# EAGLE board homeboard9 (EAGLE 6.0)
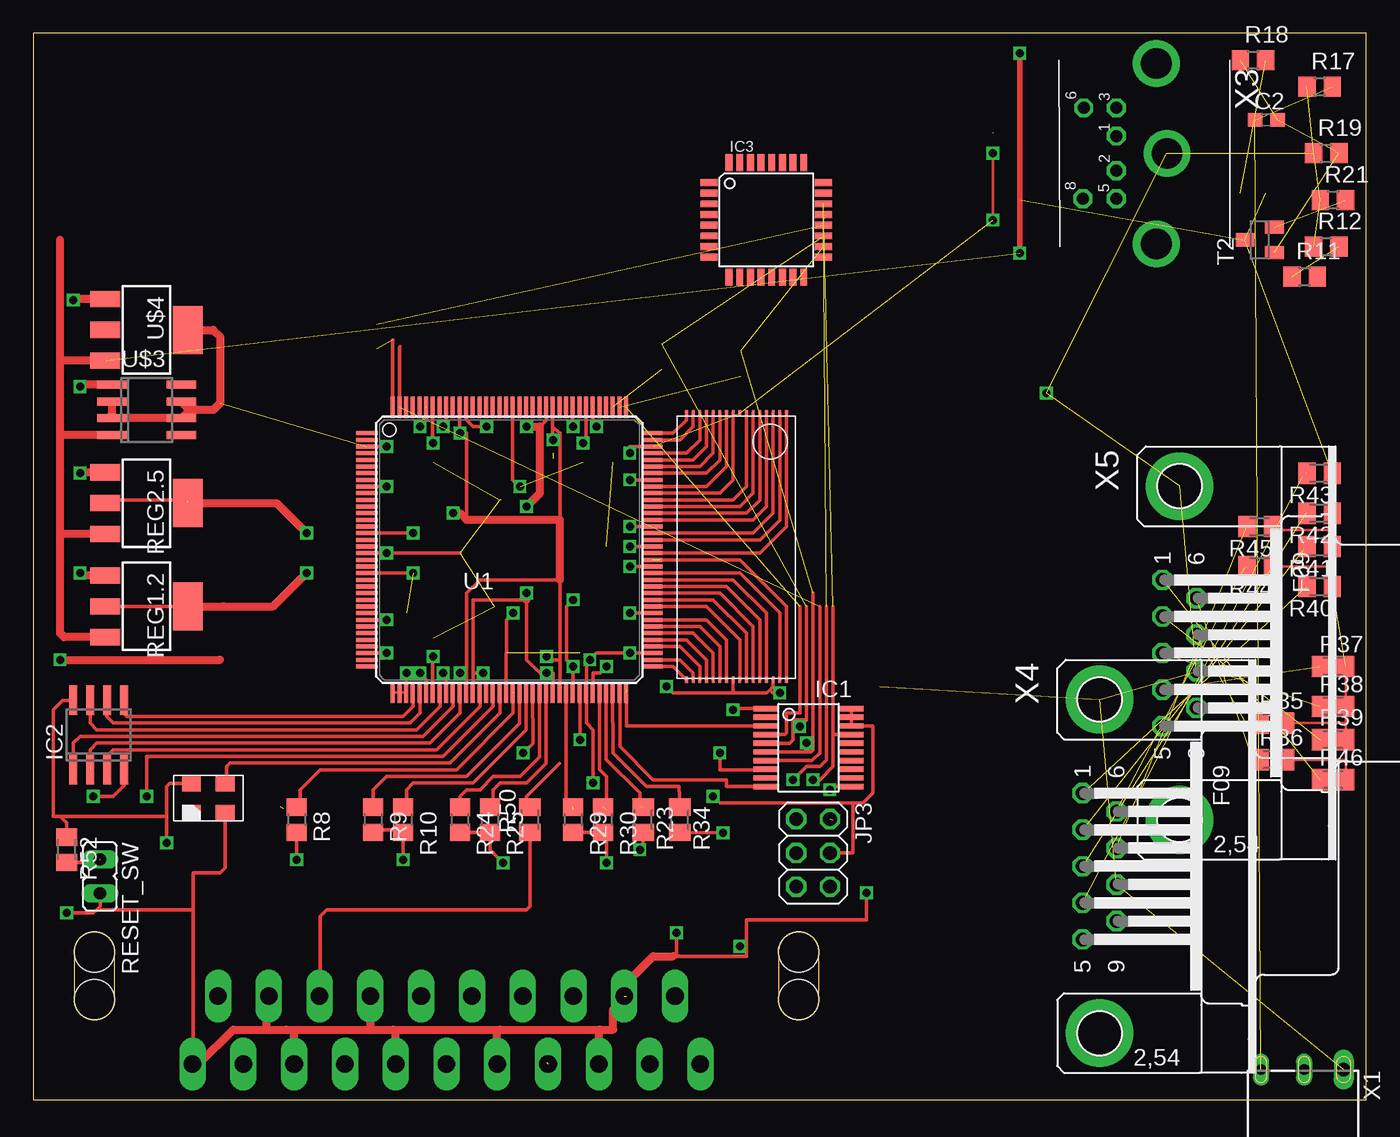
[diagram p0: board, top side]
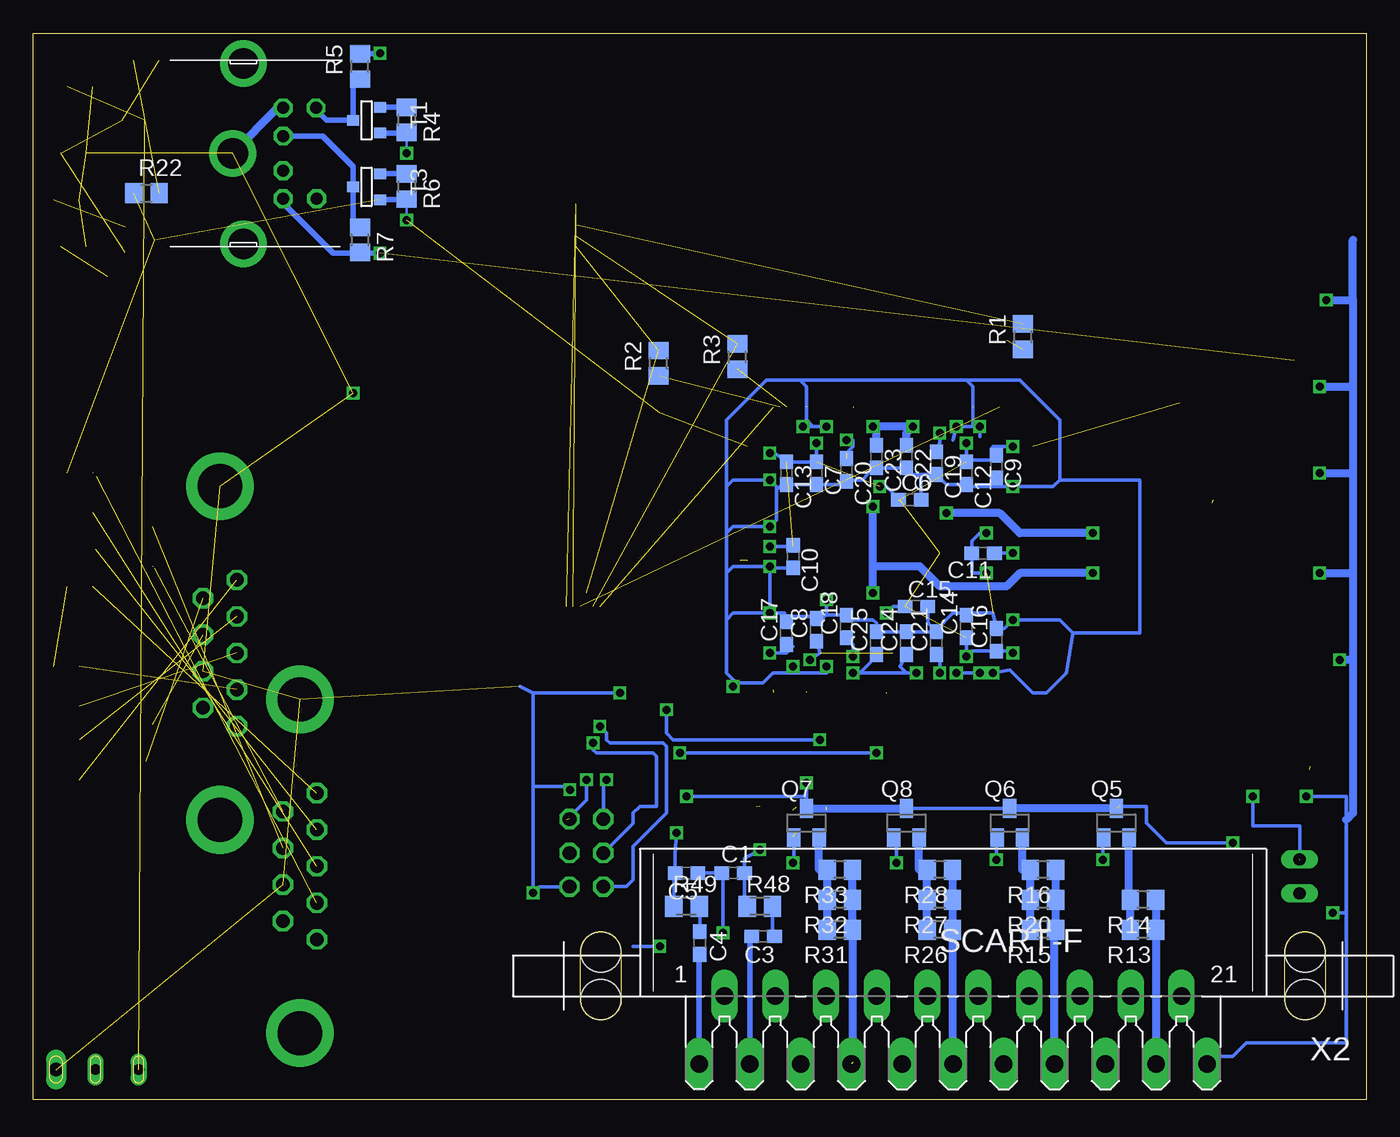
[diagram p1: board, bottom side, seen from below]

Size 100 x 80 mm. Coordinates in mm from the lower left corner, seen from the top.
Outline: 0,0 100,0 100,80 0,80 0,0
Copper layers (1*16): Top 0.0356mm / dielectric 1.5011mm / Bottom 0.0356mm
Design rules: minimum track width 6mil, minimum drill 13mil, track to track 6mil, track to pad 6mil, pad to pad 6mil, via to via 6mil, smd to smd 6mil, copper to edge 15mil, drill to drill 6mil, minimum pad ring 7mil, minimum via ring 7mil, stop-mask expansion 4mil, vias tented up to drill 0mil, thermal gap 10mil
Net classes: 1 power: width 0.6 mm, drill 1.1 mm, clearance 0.4 mm

## Footprints (pad centres in the part's own frame; a part is rotated, then mirrored left to right if it is on the bottom)
C0603 = smd 1.1 x 1: 1 -0.85,0; 2 0.85,0
VO20 = smd 0.4 x 1.8: 1 5.85,6.15; 2 5.2,6.15; 3 4.55,6.15; 4 3.9,6.15; 5 3.25,6.15; 6 2.6,6.15; 7 1.95,6.15; 8 1.3,6.15; 9 0.65,6.15; 10 0,6.15; 11 0,-0.3; 12 0.65,-0.3; 13 1.3,-0.3; 14 1.95,-0.3; 15 2.6,-0.3; 16 3.25,-0.3; 17 3.9,-0.3; 18 4.55,-0.3; 19 5.2,-0.3; 20 5.85,-0.3
SO-08 = smd 0.6 x 2.2: 1 -1.905,-2.6; 2 -0.635,-2.6; 3 0.635,-2.6; 4 1.905,-2.6; 5 1.905,2.6; 6 0.635,2.6; 7 -0.635,2.6; 8 -1.905,2.6
TQFP32-08 = smd 1.27 x 0.508: 1 -4.293,2.8; 2 -4.293,2; 3 -4.293,1.2; 4 -4.293,0.4; 5 -4.293,-0.4; 6 -4.293,-1.2; 7 -4.293,-2; 8 -4.293,-2.8; 17 4.293,-2.8; 18 4.293,-2; 19 4.293,-1.2; 20 4.293,-0.4; 21 4.293,0.4; 22 4.293,1.2; 23 4.293,2; 24 4.293,2.8 | smd 0.508 x 1.27: 9 -2.8,-4.293; 10 -2,-4.293; 11 -1.2,-4.293; 12 -0.4,-4.293; 13 0.4,-4.293; 14 1.2,-4.293; 15 2,-4.293; 16 2.8,-4.293; 25 2.8,4.293; 26 2,4.293; 27 1.2,4.293; 28 0.4,4.293; 29 -0.4,4.293; 30 -1.2,4.293; 31 -2,4.293; 32 -2.8,4.293
2X03 = drill 1.016 octagon: 1 -2.54,-1.27; 2 -2.54,1.27; 3 0,-1.27; 4 0,1.27; 5 2.54,-1.27; 6 2.54,1.27
SOT23 = smd 1 x 1.4: 1 -0.95,-1.1; 2 0.95,-1.1; 3 0,1.1
R0805 = smd 1.3 x 1.5: 1 -0.95,0; 2 0.95,0
M0805 = smd 1.3 x 1.6: 1 -0.95,0; 2 0.95,0
SOT223 = smd 1.219 x 2.235: 1 -2.311,-3.099; 2 0,-3.099; 3 2.311,-3.099 | smd 3.6 x 2.2: 4 0,3.099
JP1 = drill 0.914 long: 1 0,-1.27; 2 0,1.27
SOT-23 = smd 0.787 x 0.889: 1 0.025,-1.016; 2 -0.94,1.016; 3 0.991,1.016
TQ144 = smd 1.6 x 0.3: P1 -10.7,8.75; P2 -10.7,8.25; P3 -10.7,7.75; P4 -10.7,7.25; P5 -10.7,6.75; P6 -10.7,6.25; P7 -10.7,5.75; P8 -10.7,5.25; P9 -10.7,4.75; P10 -10.7,4.25; P11 -10.7,3.75; P12 -10.7,3.25; P13 -10.7,2.75; P14 -10.7,2.25; P15 -10.7,1.75; P16 -10.7,1.25; P17 -10.7,0.75; P18 -10.7,0.25; P19 -10.7,-0.25; P20 -10.7,-0.75; P21 -10.7,-1.25; P22 -10.7,-1.75; P23 -10.7,-2.25; P24 -10.7,-2.75; P25 -10.7,-3.25; P26 -10.7,-3.75; P27 -10.7,-4.25; P28 -10.7,-4.75; P29 -10.7,-5.25; P30 -10.7,-5.75; P31 -10.7,-6.25; P32 -10.7,-6.75; P33 -10.7,-7.25; P34 -10.7,-7.75; P35 -10.7,-8.25; P36 -10.7,-8.75; P73 10.7,-8.75; P74 10.7,-8.25; P75 10.7,-7.75; P76 10.7,-7.25; P77 10.7,-6.75; P78 10.7,-6.25; P79 10.7,-5.75; P80 10.7,-5.25; P81 10.7,-4.75; P82 10.7,-4.25; P83 10.7,-3.75; P84 10.7,-3.25; P85 10.7,-2.75; P86 10.7,-2.25; P87 10.7,-1.75; P88 10.7,-1.25; P89 10.7,-0.75; P90 10.7,-0.25; P91 10.7,0.25; P92 10.7,0.75; P93 10.7,1.25; P94 10.7,1.75; P95 10.7,2.25; P96 10.7,2.75; P97 10.7,3.25; P98 10.7,3.75; P99 10.7,4.25; P100 10.7,4.75; P101 10.7,5.25; P102 10.7,5.75; P103 10.7,6.25; P104 10.7,6.75; P105 10.7,7.25; P106 10.7,7.75; P107 10.7,8.25; P108 10.7,8.75 | smd 0.3 x 1.6: P37 -8.75,-10.7; P38 -8.25,-10.7; P39 -7.75,-10.7; P40 -7.25,-10.7; P41 -6.75,-10.7; P42 -6.25,-10.7; P43 -5.75,-10.7; P44 -5.25,-10.7; P45 -4.75,-10.7; P46 -4.25,-10.7; P47 -3.75,-10.7; P48 -3.25,-10.7; P49 -2.75,-10.7; P50 -2.25,-10.7; P51 -1.75,-10.7; P52 -1.25,-10.7; P53 -0.75,-10.7; P54 -0.25,-10.7; P55 0.25,-10.7; P56 0.75,-10.7; P57 1.25,-10.7; P58 1.75,-10.7; P59 2.25,-10.7; P60 2.75,-10.7; P61 3.25,-10.7; P62 3.75,-10.7; P63 4.25,-10.7; P64 4.75,-10.7; P65 5.25,-10.7; P66 5.75,-10.7; P67 6.25,-10.7; P68 6.75,-10.7; P69 7.25,-10.7; P70 7.75,-10.7; P71 8.25,-10.7; P72 8.75,-10.7; P109 8.75,10.7; P110 8.25,10.7; P111 7.75,10.7; P112 7.25,10.7; P113 6.75,10.7; P114 6.25,10.7; P115 5.75,10.7; P116 5.25,10.7; P117 4.75,10.7; P118 4.25,10.7; P119 3.75,10.7; P120 3.25,10.7; P121 2.75,10.7; P122 2.25,10.7; P123 1.75,10.7; P124 1.25,10.7; P125 0.75,10.7; P126 0.25,10.7; P127 -0.25,10.7; P128 -0.75,10.7; P129 -1.25,10.7; P130 -1.75,10.7; P131 -2.25,10.7; P132 -2.75,10.7; P133 -3.25,10.7; P134 -3.75,10.7; P135 -4.25,10.7; P136 -4.75,10.7; P137 -5.25,10.7; P138 -5.75,10.7; P139 -6.25,10.7; P140 -6.75,10.7; P141 -7.25,10.7; P142 -7.75,10.7; P143 -8.25,10.7; P144 -8.75,10.7
TSOP32 = smd 0.5 x 0.2: P1 -9.75,3.75; P2 -9.75,3.25; P3 -9.75,2.75; P4 -9.75,2.25; P5 -9.75,1.75; P6 -9.75,1.25; P7 -9.75,0.75; P8 -9.75,0.25; P9 -9.75,-0.25; P10 -9.75,-0.75; P11 -9.75,-1.25; P12 -9.75,-1.75; P13 -9.75,-2.25; P14 -9.75,-2.75; P15 -9.75,-3.25; P16 -9.75,-3.75; P17 10.25,-3.75; P18 10.25,-3.25; P19 10.25,-2.75; P20 10.25,-2.25; P21 10.25,-1.75; P22 10.25,-1.25; P23 10.25,-0.75; P24 10.25,-0.25; P25 10.25,0.25; P26 10.25,0.75; P27 10.25,1.25; P28 10.25,1.75; P29 10.25,2.25; P30 10.25,2.75; P31 10.25,3.25; P32 10.25,3.75
OSC_7C = smd 1.4 x 1.2: ENA -1.27,-1.1; GND 1.27,-1.1; OUT 1.27,1.1; VDD -1.27,1.1
SO8 = smd 0.6 x 2.2: 1 -1.905,-2.6; 2 -0.635,-2.6; 3 0.635,-2.6; 4 1.905,-2.6; 5 1.905,2.6; 6 0.635,2.6; 7 -0.635,2.6; 8 -1.905,2.6
1503_04 = drill 0.8 pad 1.2 long: 1 3.9,-10.25; 2 0.65,-10.25 | drill 1 pad 1.2 long: 3 -2.3,-10.25 | hole 1.6: 0,0
SCART-F = drill 1.321 long: 1 19.05,5.08; 2 17.145,0; 3 15.24,5.08; 4 13.335,0; 5 11.43,5.08; 6 9.525,0; 7 7.62,5.08; 8 5.715,0; 9 3.81,5.08; 10 1.905,0; 11 0,5.08; 12 -1.905,0; 13 -3.81,5.08; 14 -5.715,0; 15 -7.62,5.08; 16 -9.525,0; 17 -11.43,5.08; 18 -13.335,0; 19 -15.24,5.08; 20 -17.145,0; 21 -19.05,5.08 | hole 3.023: 26.416,0.254; 26.416,-3.302; -26.416,0.254; -26.416,-3.302
M_DIN6 = drill 0.9 pad 1.422 octagon: 1 -1.3,-3.75; 2 1.3,-3.75; 3 -3.4,-3.75; 5 3.4,-3.75; 6 -3.4,-6.2; 8 3.4,-6.25 | drill 2.3 pad 3.5: SH1 6.8,-0.75; SH2 0,0.05; SH3 -6.75,-0.75
F09HP = drill 1.016 octagon: 1 -5.486,-1.27; 2 -2.743,-1.27; 3 0,-1.27; 4 2.743,-1.27; 5 5.486,-1.27; 6 -4.115,1.27; 7 -1.372,1.27; 8 1.372,1.27; 9 4.115,1.27 | drill 3.302 pad 5.08: G1 -12.522,0; G2 12.522,0

## Placement (x,y rotation side)
C1  [C0603]  47.5,17 0 bottom
C2  100nF  [C0603]  92.5,73.5 0 top
C3  [C0603]  45.25,12.25 180 bottom
C4  [C0603]  50,11.75 270 bottom
C5  [C0603]  51,17 180 bottom
C6  100nF  [C0603]  34.25,45 0 bottom
C7  100nF  [C0603]  41.25,47 270 bottom
C8  100nF  [C0603]  41.25,35.25 90 bottom
C9  100nF  [C0603]  27.75,47.5 270 bottom
C10  100nF  [C0603]  43,40.75 270 bottom
C11  100nF  [C0603]  28.75,41 180 bottom
C12  100nF  [C0603]  30,47 270 bottom
C13  100nF  [C0603]  43.5,47 270 bottom
C14  100nF  [C0603]  30,35.5 90 bottom
C15  100nF  [C0603]  33.75,37 0 bottom
C16  100nF  [C0603]  27.75,34.5 90 bottom
C17  100nF  [C0603]  43.5,35 90 bottom
C18  100nF  [C0603]  39,35.5 90 bottom
C19  100nF  [C0603]  32.25,47.75 270 bottom
C20  100nF  [C0603]  39,47.25 270 bottom
C21  100nF  [C0603]  32.25,34.25 90 bottom
C22  100nF  [C0603]  34.5,48.25 270 bottom
C23  100nF  [C0603]  36.75,48.25 270 bottom
C24  100nF  [C0603]  34.5,34.25 90 bottom
C25  100nF  [C0603]  36.75,34.25 90 bottom
IC1  XCF02S  [VO20]  61.09,23.49 90 top
IC2  25LC080SN  [SO-08]  4.9,27.36 0 top
IC3  ATMEGA32U2-TQFP  [TQFP32-08]  55,66 0 top
JP3  [2X03]  58.5,18.5 270 top
Q5  BC848SMD  [SOT23]  18.75,20.75 0 bottom
Q6  BC848SMD  [SOT23]  26.75,20.75 0 bottom
Q7  BC848SMD  [SOT23]  42,20.75 0 bottom
Q8  BC848SMD  [SOT23]  34.5,20.75 0 bottom
R1  100  [R0805]  25.75,57.24 90 bottom
R2  100  [R0805]  53.08,55.25 90 bottom
R3  100  [R0805]  47.18,55.74 90 bottom
R4  1000  [R0805]  72,73.5 270 bottom
R5  1000  [R0805]  75.5,77.5 90 bottom
R6  1000  [R0805]  72,68.5 270 bottom
R7  1000  [R0805]  75.5,64.5 270 bottom
R8  2200  [R0805]  19.75,21 270 top
R9  2200  [R0805]  25.5,21 270 top
R10  1000  [R0805]  27.75,21 270 top
R11  75  [R0805]  95.38,61.75 0 top
R12  750  [R0805]  97,64 0 top
R13  680  [R0805]  16.75,12.75 180 bottom
R14  2200  [R0805]  16.75,15 180 bottom
R15  270  [R0805]  24.25,12.75 180 bottom
R16  680  [R0805]  24.25,17.25 180 bottom
R17  10000  [R0805]  96.5,76 0 top
R18  4700  [R0805]  91.5,78 0 top
R19  10000  [R0805]  97,71 0 top
R20  4700  [R0805]  24.25,15 180 bottom
R21  47000  [R0805]  97.5,67.5 0 top
R22  1000  [R0805]  91.5,68 0 bottom
R23  [M0805]  45.75,21 270 top
R24  2200  [R0805]  32,21 270 top
R25  1000  [R0805]  34.25,21 270 top
R26  270  [R0805]  32,12.75 180 bottom
R27  680  [R0805]  32,15 180 bottom
R28  4700  [R0805]  32,17.25 180 bottom
R29  2200  [R0805]  40.5,21 270 top
R30  1000  [R0805]  42.75,21 270 top
R31  270  [R0805]  39.5,12.75 180 bottom
R32  680  [R0805]  39.5,15 180 bottom
R33  4700  [R0805]  39.5,17.25 180 bottom
R34  [M0805]  48.5,21 270 top
R35  [M0805]  93,28.25 0 top
R36  [M0805]  93,25.5 0 top
R37  [M0805]  97.5,32.5 0 top
R38  [M0805]  97.5,29.5 0 top
R39  [M0805]  97.5,27 0 top
R40  [M0805]  96.5,38.5 180 top
R41  [M0805]  96.5,41.5 180 top
R42  [M0805]  96.5,44 180 top
R43  [M0805]  96.5,47 180 top
R44  [M0805]  92,40 180 top
R45  [M0805]  92,43 180 top
R46  [M0805]  97.5,24 0 top
R48  [M0805]  45.5,14.5 0 bottom
R49  [M0805]  51,14.5 0 bottom
R50  2k2  [M0805]  37.25,21 90 top
R52  4K7  [M0805]  2.5,18.75 270 top
REG1.2  1.2V  [SOT223]  8.5,37 270 top
REG2.5  2.5V  [SOT223]  8.5,44.75 270 top
RESET_SW  [JP1]  5,16.75 180 top
T1  BSS138  [SOT-23]  75,73.5 270 bottom
T2  BC848  [SOT23]  92,64.5 90 top
T3  BSS138  [SOT-23]  75,68.5 270 bottom
U1  XC3S400TQ144  [TQ144]  35.72,41.25 0 top
U$1  AS6C4008  [TSOP32]  52.75,41.75 270 top
U$2  TXO_7C  [OSC_7C]  13.12,22.62 0 top
U$3  MC33269D  [SO8]  8.5,51.75 270 top
U$4  3.3V  [SOT223]  8.5,57.75 270 top
X1  1503_04  [1503_04]  96,-8 180 top
X2  SCART-F  [SCART-F]  31,7.75 180 bottom
X3  [M_DIN6]  85,71 270 top
X4  [F09HP]  80,17.5 270 top
X5  [F09HP]  86,33.5 270 top

## Library data of the parts
C1-C5 R23 R34-R46 R48-R50 R52 = resistor
C6-C25 R1-R22 R24-R33 = rcl
IC1 = smd-special
IC2 = microchip; MF: MICROCHIP; MPN: 25LC080/SN; OC_FARNELL: 1137302; OC_NEWARK: 96K4092
IC3 = adafruit
JP3 = pinhead
Q5-Q8 = bc548
REG1.2 REG2.5 U$1-U$4 = cpcfpga
RESET_SW = jumper
T1 T3 = zetex; OC_FARNELL: unknown; OC_NEWARK: unknown
T2 = transistor
U1 = xilinx_spartan3_virtex4_and_5
X1 = con-lumberg; OC_FARNELL: 1216981; OC_NEWARK: unknown
X2 = con-hirschmann; OC_FARNELL: unknown; OC_NEWARK: unknown
X3 = mini_din
X4 X5 = con-subd; OC_FARNELL: unknown; OC_NEWARK: unknown

## Nets
AINLEFT: X2.6
AINRIGHT: X2.2
B0: R30.1 U1.P68
B1: R29.1 U1.P63
CASIN: R21.2 T2.2
CLK16: U1.P53 U$2.OUT
CLK_5V: R5.1 T1.1 X3.6
COMPIN: X2.20
CSYNC: R8.1 U1.P55
D_FASTBLANKING: R11.1 R12.2
DATA_5V: R7.1 T3.1 X3.1
EMER_BOOT: IC3.13
FL_DI: IC2.5 U1.P40
FL_DO: IC2.2 U1.P47
FL_HOLD: IC2.7 U1.P44
FL_SCLK: IC2.6 U1.P41
FL_SEL: IC2.1 U1.P46
FL_WP: IC2.3 U1.P50
FPGA_AUDIO_LEFT: R23.1 U1.P69
FPGA_AUDIO_RIGHT: R34.1 U1.P70
G0: R25.1 U1.P60
G1: R24.1 U1.P59
GND: C1.1 C5.1 C6.2 C7.2 C8.2 C9.2 C10.2 C11.2 C12.2 C13.2 C14.2 C15.2 C16.2 C17.2 C18.2 C19.2 C20.2 C21.2 C22.2 C23.2 C24.2 C25.2 IC1.11 IC2.4 JP3.6 R12.1 R17.1 R19.1 R21.1 REG1.2.1 REG2.5.1 RESET_SW.2 U1.P9 U1.P16 U1.P22 U1.P29 U1.P37 U1.P38 U1.P39 U1.P42 U1.P45 U1.P64 U1.P67 U1.P81 U1.P88 U1.P94 U1.P101 U1.P114 U1.P117 U1.P136 U1.P139 U$1.P24 U$1.P30 U$2.GND U$3.1 U$4.1 X1.3 X2.4 X2.5 X2.9 X2.13 X2.14 X2.17 X2.18 X2.21 X3.3 X3.SH2 X4.8 X4.G1 X5.8 X5.G1
N$1: U1.P108 U$1.P16
N$2: U1.P107 U$1.P15
N$3: U1.P105 U$1.P14
N$4: U1.P104 U$1.P13
N$5: U1.P103 U$1.P12
N$6: U1.P102 U$1.P11
N$7: U1.P100 U$1.P10
N$8: U1.P99 U$1.P9
N$9: U1.P98 U$1.P7
N$10: U1.P97 U$1.P6
N$11: U1.P96 U$1.P5
N$12: U1.P95 U$1.P4
N$13: U1.P93 U$1.P3
N$14: U1.P92 U$1.P2
N$15: U1.P90 U$1.P1
N$16: U1.P73 U$1.P17
N$17: U1.P74 U$1.P18
N$18: U1.P76 U$1.P19
N$19: U1.P77 U$1.P20
N$20: U1.P78 U$1.P21
N$21: U1.P79 U$1.P22
N$22: U1.P80 U$1.P23
N$23: U1.P82 U$1.P25
N$24: U1.P83 U$1.P26
N$25: U1.P84 U$1.P27
N$26: U1.P85 U$1.P28
N$27: U1.P86 U$1.P29
N$28: U1.P87 U$1.P31
N$29: U1.P89 U$1.P32
N$30: R35.1 X5.7
N$31: R36.1 X5.6
N$32: R37.1 X5.4
N$33: R38.1 X5.3
N$34: R39.1 X5.2
N$35: IC1.3 U1.P72
N$37: R46.1 X5.1
N$38: IC1.10 U1.P71
N$39: R2.1 U1.P110
N$40: IC1.7 U1.P143
N$41: R40.2 X4.1
N$42: R1.1 U1.P144
N$43: R3.1 U1.P111
N$44: R41.2 X4.2
N$45: R42.2 X4.3
N$46: R43.2 X4.4
N$47: R44.2 X4.6
N$48: R45.2 X4.7
N$51: C1.2 R23.2 R48.1
N$52: C3.1 R48.2
N$53: Q6.1 R9.2 R10.2
N$54: Q6.2 R15.2 R16.2 R20.2
N$55: Q8.1 R24.2 R25.2
N$56: Q8.2 R26.2 R27.2 R28.2
N$57: Q7.1 R29.2 R30.2
N$58: Q7.2 R31.2 R32.2 R33.2
N$59: Q5.2 R13.2 R14.2
N$60: C2.2 R18.1 R19.2 T2.1
N$61: C2.1 R17.2 X1.1
N$62: R18.2 R22.2
N$63: Q5.1 R8.2
N$64: C4.1 R49.2
N$65: C5.2 R34.2 R49.1
N$67: U1.P26
N$73: U1.P12
PE1: X3.SH1
PE3: X3.SH3
PROM_DO: IC1.1 U1.P65
PROM_INITB: IC1.8 U1.P58
PS2CLK: R4.1 T1.2
PS2DAT: R6.1 T3.2
R0: R10.1 U1.P57
R1: R9.1 U1.P56
RESET: R52.2 RESET_SW.1 U1.P52
RXD: IC3.8
SCART_BLANKING: R50.1 X2.16
SCART_BLUE: R31.1 R32.1 R33.1 X2.7
SCART_COMP: R13.1 R14.1 X2.19
SCART_GREEN: R26.1 R27.1 R28.1 X2.11
SCART_LEFT: C3.2 X2.3
SCART_MODE: X2.8
SCART_RED: R15.1 R16.1 R20.1 X2.15
SCART_RIGHT: C4.2 X2.1
SPI_MISO: IC3.17
SPI_MOSI: IC3.16
SPI_SCLK: IC3.15
SPI_SEL: IC3.14
TCK: IC1.6 IC3.18 JP3.3 R2.2
TDI_FPGA: IC3.20 R1.2
TDO_EXP: IC3.21 JP3.1
TDO_FPGA: IC1.4 U1.P109
TDO_PROM: IC1.17 IC3.22 JP3.2
TMS: IC1.5 IC3.19 JP3.5 R3.2
TXD: IC3.9
VCC: C6.1 C7.1 C8.1 C9.1 C10.1 C11.1 C12.1 C13.1 C14.1 C15.1 C16.1 C17.1 IC1.18 IC1.19 IC1.20 IC2.8 JP3.4 Q5.3 Q6.3 Q7.3 Q8.3 R4.2 R6.2 R22.1 R35.2 R36.2 R37.2 R38.2 R39.2 R40.1 R41.1 R42.1 R43.1 R44.1 R45.1 R46.2 R52.1 T1.3 T2.3 T3.3 U1.P3 U1.P19 U1.P34 U1.P43 U1.P54 U1.P66 U1.P75 U1.P91 U1.P106 U1.P115 U1.P126 U1.P138 U$1.P8 U$2.VDD U$3.2 U$3.3 U$3.6 U$3.7 U$4.4
VCC5: R5.2 R7.2 REG1.2.3 REG2.5.3 U$3.4 U$4.3 X3.5
VCC_B3: R11.2
VCCAUX: C18.1 C19.1 C20.1 C21.1 REG2.5.2 REG2.5.4 U1.P48 U1.P62 U1.P120 U1.P134
VCCAUX_R: R50.2
VCCINT: C22.1 C23.1 C24.1 C25.1 REG1.2.2 REG1.2.4 U1.P49 U1.P61 U1.P121 U1.P133
X6: U1.P51
XXCSYNC: U1.P137
XXR0: U1.P140
XXR1: U1.P141

## Tracks (layer width: path | path; a pad name or v marks a point on that pad's centre or on a via)
B0  (1 unrouted)
  Top 0.254: 43,21.75 43,24.25 42.48,24.77 U1.P68
B1  (1 unrouted)
  Top 0.254: 40.5,21.75 39.98,22.27 U1.P63
CASIN  (1 unrouted)
CLK16
  Top 0.254: U$2.OUT 14.39,23.89 14.5,24 14.5,25 14.75,25.25 31.25,25.25 35,29 35,30.52 U1.P53
CLK_5V
  Bottom 0.3: 76.02,76.03 R5.1
  Bottom 0.4: X3.6 78.8,74.3 78,73.5 76.04,73.5 T1.1 76.02,76.03
CSYNC  (1 unrouted)
  Top 0.254: R8.1 20,22.2 20,23.25 21.5,24.75 31.75,24.75 36,29 36,30.5
D_FASTBLANKING  (1 unrouted)
DATA_5V
  Bottom 0.4: R7.1 76.02,65.97 T3.1 76,68.49 76,70 78.3,72.3 X3.1
FL_DI
  Top 0.254: IC2.5 6.75,29.91 6.75,29 7,28.75 27.75,28.75 28.5,29.5 28.5,30.52 U1.P40
FL_DO  (1 unrouted)
  Top 0.254: 4.25,25 4.25,26.25 4.75,26.75 29.75,26.75 32,29 32,30.52 U1.P47
FL_HOLD
  Top 0.254: IC2.7 4.25,28.25 4.75,27.75 28.75,27.75 30.5,29.5 30.5,30.52 U1.P44
FL_SCLK
  Top 0.254: IC2.6 5.5,29.93 5.5,28.75 6,28.25 28.25,28.25 29,29 29,30.52 U1.P41
FL_SEL
  Top 0.254: IC2.1 3,26.75 3.5,27.25 29.25,27.25 31.5,29.5 31.5,30.52 U1.P46
FL_WP
  Top 0.254: IC2.3 5.5,25.29 5.5,25.75 6,26.25 30.25,26.25 33.5,29.5 33.5,30.52 U1.P50
FPGA_AUDIO_LEFT  (1 unrouted)
  Top 0.254: 45.5,22 45.5,23 42.98,25.52 U1.P69
FPGA_AUDIO_RIGHT
  Top 0.254: R34.1 48.45,23.5 46,23.5 43.48,26.02 U1.P70
G0
  Top 0.254: R25.1 34.25,22 34,22.25 34,21.75 34.5,22.25 34.5,23.25 35,23.75 37,23.75 38.48,25.23 U1.P60
G1
  Top 0.254: 32,21.75 R24.1 32,22.75 32.5,23.25 33.5,23.25 34.5,24.25 36.5,24.25 37.98,25.73 U1.P59
GND  (via drill 0.6)  (16 unrouted)
  Top 0.2: U1.P37 U1.P38 U1.P39
  Top 0.254: 17.5,7.75 X2.18 | U$1.P30 55.5,31 55.25,30.75 | 55.25,30.75 55,30.5 52.5,30.5 | 48.25,10.75 53.5,10.75 53.5,11 | 48.25,10.75 48,10.75 | 12,14.25 12,2.75 | 12,14.25 12,17 14,17 14.39,17.39 U$2.GND | IC2.4 6.8,23.55 6,22.75 v4.5,22.75 | 52.5,30.5 48,30.5 v47.5,31 | v48.25,12.5 48.25,10.75 | v56,30.5 55.5,30.5 55.25,30.75 | 4.75,14.25 12,14.25 | 53.5,11 v53,11.5 | 53.5,11 53.5,13.5 62.5,13.5 v62.5,15.5 | IC1.11 59.76,23.49 v59.75,23.25 | 52.5,30.5 U$1.P24 | RESET_SW.2 5,14.5 4.75,14.25 | 4.75,14.25 4.5,14 v2.5,14 | U1.P9 v26.5,46 | U1.P29 v26.5,36 | U1.P22 v28.5,39.5 | U1.P45 30.97,31.97 v30.75,32 | U1.P39 27.97,31.97 v28,32 v29,32 29.47,31.53 U1.P42 | U1.P16 v28.5,42.5 | v29,50.5 29.5,51 29.5,52 | U1.P136 30.97,51.03 v30.75,50.5 | U1.P81 v44.75,36.5 | U1.P88 v44.75,40 | U1.P101 v44.75,46.5 | U1.P94 v44.75,43 | 42,30.57 42,32 42.5,32 v43,32.5 | U1.P64 40.5,30.58 v40.5,32.5 40,33 40,37 v40.5,37.5 | U1.P117 40.47,50.53 v40.5,50.5 | v42.25,50.5 42,50.5 42,52
  Top 0.4: X2.21 12.42,2.67 | 25.29,5.46 25.5,5.25
  Top 0.406: 27.19,5.06 27,5.25 | 34.81,5.06 35,5.25 | 19.57,5.18 19.5,5.18 | 19.57,5.11 19.5,5.18 | 42.43,5.18 42.5,5.25 | 19.5,5.18 19,5.18 19,5.25
  Top 0.6: 12.42,2.67 15,5.25 17.5,5.25 | 17.5,5.25 19,5.25 25.5,5.25 27,5.25 35,5.25 42.5,5.25 43.5,5.25 43.5,6.75 44.5,7.75 44.5,8.75 46.5,10.75 48,10.75 | X2.13 27.19,5.06 | X2.9 34.81,5.06 | X2.17 19.57,5.11 | X2.5 42.43,5.18 | X2.14 25.29,5.46 | 17.5,5.25 17.5,7.75
  Top 0.61: U$4.1 3.06,60.06 v3,60 | REG2.5.1 3.56,47.06 v3.5,47 | U$3.1 3.65,53.66 v3.5,53.5 | REG1.2.1 3.69,39.31 v3.5,39.5 | v2,33 14,33
  Bottom 0.254: C5.1 C1.1 48.25,17 v48.25,12.5 | v4.5,22.75 1.5,22.75 1.5,21 1.5,14 | 1.5,14 1.5,4.25 9,4.25 10,3.25 11.37,3.25 X2.21 | v59.75,23.25 59.75,23.5 62.5,23.5 | v53,11.5 55,11.5 | 62.5,23.5 v62.5,15.5 62.04,15.96 JP3.6 | 47.25,31.25 45.25,31.25 44.5,32 43.5,32 | 47.25,31.25 v47.5,31 | 62.5,30.5 63.5,31 | v56,30.5 62.5,30.5 | 62.5,30.5 62.5,23.5 | v2.5,14 1.5,14 | 29,49.75 v29,50.5 29.5,50.5 | 28,46 v26.5,46 23.5,46 23,46.5 | v28,32 26.75,32.25 25,30.5 24,30.5 22.5,32 22,35 | v29,32 v30.75,32 | C9.2 28,46 | v44.75,36.5 43.65,36.5 C17.2 43.25,36.25 41,36.25 C8.2 40.9,36 40.55,36.35 40.5,36.35 | v44.75,40 44.65,39.9 C10.2 | 44.25,45.75 44.25,43.5 v44.75,43 47.5,43 48,42.5 | 44.25,45.75 44.25,46 v44.75,46.5 47.5,46.5 48,46 | v43,32.5 43.5,32 | v40.5,32.5 40.5,32 43.5,32 | 30.15,36.5 28,36.5 C16.2 27.15,35.35 v26.5,36 23,36 22,35 | C21.2 C24.2 C25.2 36.75,35.75 37,36 38.65,36 C18.2 40.5,36.35 | v44.75,36.5 v44.75,40 | v40.5,37.5 40.5,36.35 | C15.2 32.9,35.75 C21.2 | C21.2 32.25,35.25 31,36.5 30.15,36.5 | 30.15,36.5 C14.2 | 31,49.5 v30.75,50.5 29.5,50.5 | 39,46.5 37.75,46.5 37.1,47.4 C23.2 C22.2 34,46.9 33.5,46.9 | 39,46.5 39.15,46.5 C20.2 | 33.5,46.9 C19.2 31.5,46.15 C12.2 29.85,46 28,46 | v40.5,50.5 41.5,50.5 | 41.5,50.5 v42.25,50.5 | 39,46.5 39.35,46.15 C7.2 C13.2 43.85,46.15 44.25,45.75 | C6.2 33.4,46.8 33.5,46.9 | 22,35 17,35 17,46.5 23,46.5 | 23,46.5 23,51 26,54 30,54 | 30,54 29.5,53.5 29.5,50.5 | 30,54 42.5,54 | 42.5,54 42,53.5 42,51 41.5,50.5 | 42.5,54 45,54 48,51 48,46 | 48,46 48,42.5 | 48,42.5 48,39.5 | 48,39.5 47.5,40 v44.75,40 | 48,39.5 48,36 | 48,36 47.5,36.5 v44.75,36.5 | 48,36 48,32 47.25,31.25 | v28.5,42.5 29,42.5 29.6,41.9 C11.2 29.6,39.6 29.5,39.5 v28.5,39.5
  Bottom 0.6: X3.3 81.65,74.4 X3.SH2
  Bottom 0.61: v3,60 1,60 | 1,60 1,64.5 | 1,60 1,53.5 | 1,53.5 1,47 | 1,47 1,39.5 | 1,39.5 1,33 | 1,33 v2,33 | 1,33 1,21.5 1.5,21 | v3.5,47 1,47 | v3.5,53.5 1,53.5 | v3.5,39.5 1,39.5
  other vias: 76,53
N$1
  Top 0.254: U1.P108 48,50 49,51 U$1.P16
N$2
  Top 0.254: U$1.P15 49.5,50.5 48.5,49.5 U1.P107
N$3
  Top 0.254: U$1.P14 50,49.5 49,48.5 U1.P105
N$4
  Top 0.254: U1.P104 49.5,48 50.5,49 U$1.P13
N$5
  Top 0.254: U1.P103 50,47.5 51,48.5 U$1.P12
N$6
  Top 0.254: U$1.P11 51.5,48 50.5,47 U1.P102
N$7
  Top 0.254: U1.P100 50.5,46 52,47.5 U$1.P10
N$8
  Top 0.254: U1.P99 51.5,45.5 52.5,46.5 U$1.P9
N$9
  Top 0.254: U$1.P7 53.5,46 52.5,45 U1.P98
N$10
  Top 0.254: U1.P97 53,44.5 54,45.5 U$1.P6
N$11
  Top 0.254: U$1.P5 54.5,45 53.5,44 U1.P96
N$12
  Top 0.254: U$1.P4 55,44.5 54,43.5 U1.P95
N$13
  Top 0.254: U$1.P3 55.5,44 54,42.5 U1.P93
N$14
  Top 0.254: U$1.P2 56,43.5 54.5,42 U1.P92
N$15
  Top 0.254: U$1.P1 56.5,43 54.5,41 U1.P90
N$16
  Top 0.254: U1.P73 48,32.5 U$1.P17
N$17
  Top 0.254: U1.P74 48.5,33 49.5,32 U$1.P18
N$18
  Top 0.254: U1.P76 48.5,34 50,32.5 U$1.P19
N$19
  Top 0.254: U$1.P20 50.5,33 49,34.5 U1.P77
N$20
  Top 0.254: U1.P78 49.5,35 51,33.5 U$1.P21
N$21
  Top 0.254: U$1.P22 51.5,34 50,35.5 U1.P79
N$22
  Top 0.254: U1.P80 50.5,36 52,34.5 U$1.P23
N$23
  Top 0.254: U$1.P25 53,34.5 50.5,37 U1.P82
N$24
  Top 0.254: U1.P83 51,37.5 53.5,35 U$1.P26
N$25
  Top 0.254: U$1.P27 54,35.5 51.5,38 U1.P84
N$26
  Top 0.254: U1.P85 52,38.5 54.5,36 U$1.P28
N$27
  Top 0.254: U$1.P29 55,36.5 52.5,39 U1.P86
N$28
  Top 0.254: U$1.P31 56,36.5 53,39.5 U1.P87
N$29  (1 unrouted)
  Top 0.254: U$1.P32 56.5,37 53,40.5 47,40.5
N$30  (1 unrouted)
  Top 0.2: 91.05,28.13 R35.1
N$31  (1 unrouted)
  Top 0.2: 91.55,25.39 R36.1
N$32  (1 unrouted)
N$33  (1 unrouted)
N$34  (1 unrouted)
  Top 0.2: 96.55,26.88 R39.1
N$35  (1 unrouted)
  Top 0.254: IC1.3 44.5,28.04 44.5,30.75
N$37  (1 unrouted)
N$38
  Top 0.254: IC1.10 52.01,23.49 52,23.5 52,24 46.5,24 44,26.5 44,30.52 U1.P71
N$39  (1 unrouted)
N$40  (1 unrouted)
  Top 0.254: IC1.7 58.44,25.44 59,26 59,37 | U1.P143 27.47,56.47 27.5,56.5
N$41  (1 unrouted)
  Top 0.2: 95.54,38.51 R40.2
N$42  (1 unrouted)
  Top 0.254: U1.P144 26.97,56.97 27,57
N$43  (1 unrouted)
N$44  (1 unrouted)
  Top 0.2: 95.31,41.26 R41.2
N$45  (2 unrouted)
  Top 0.2: 95,44.5 95.5,44
N$46  (2 unrouted)
  Top 0.2: 95.24,46.74 95.5,47
N$47  (2 unrouted)
  Top 0.2: 90.89,39.88 91,40
N$48  (1 unrouted)
N$51  (via drill 0.6)
  Top 0.254: R23.2 45.75,19 v45.5,18.75
  Bottom 0.254: v45.5,18.75 46.65,18.1 C1.2 46.65,14.7 R48.1
N$52
  Bottom 0.254: R48.2 44.55,12.4 C3.1
N$53  (via drill 0.6)
  Top 0.254: v27.75,18 R10.2 27.7,20.05 27.5,20.25 25.7,20.25 R9.2
  Bottom 0.254: v27.75,18 27.75,19.6 Q6.1
N$54
  Bottom 0.6: R15.2 R20.2 R16.2 25.8,17.25 Q6.2
N$55  (via drill 0.6)
  Top 0.254: R24.2 R25.2 34.25,18.75 v35.25,17.75
  Bottom 0.254: v35.25,17.75 35.25,19.45 Q8.1
N$56
  Bottom 0.6: R26.2 R27.2 R28.2 33.55,17.25 Q8.2
N$57  (via drill 0.6)  (1 unrouted)
  Top 0.254: R29.2 R30.2 | v43,17.75 43,19.75
  Bottom 0.254: Q7.1 42.95,17.8 v43,17.75
N$58
  Bottom 0.6: R31.2 R32.2 R33.2 41.05,17.25 Q7.2
N$59
  Bottom 0.6: R13.2 R14.2 17.8,15 Q5.2
N$60  (3 unrouted)
N$61  (2 unrouted)
N$62  (1 unrouted)
N$63  (via drill 0.6)
  Top 0.254: R8.2 v19.75,18
  Bottom 0.254: v19.75,18 19.75,19.6 Q5.1
N$64
  Bottom 0.254: C4.1 50,14.45 R49.2
N$65  (via drill 0.6)
  Top 0.254: v51.75,20 R34.2
  Bottom 0.254: v51.75,20 51.85,18.4 C5.2 51.95,16.9 R49.1
PROM_DO  (via drill 0.6)
  Top 0.254: 55,29.34 IC1.1 52.66,29.34 v52.5,29.25 | v41,27 41,30.52 U1.P65
  Bottom 0.254: v41,27 52,27 52.5,27.5 v52.5,29.25
PROM_INITB  (via drill 0.6)
  Top 0.254: v36.75,26 37.48,26.73 U1.P58 | v51.5,26 51.5,24.75 54.91,24.75 IC1.8
  Bottom 0.254: v36.75,26 v51.5,26
PS2CLK
  Bottom 0.4: T1.2 R4.1
PS2DAT
  Bottom 0.4: R6.1 T3.2
R0
  Top 0.254: 27.7,21.95 28,22.25 28,23.25 28.5,23.75 33,23.75 36.98,27.73 U1.P57 | R10.1 27.7,21.95 | 27.7,21.95 27.5,21.75
R1
  Top 0.254: R9.1 25.5,23.25 26.5,24.25 32.5,24.25 36.48,28.23 U1.P56
RESET  (via drill 0.6)  (1 unrouted)
  Top 0.254: v8.5,22.75 8.5,25.75 30.75,25.75 34.5,29.5 34.5,30.52 U1.P52 | R52.2 4.8,17.8 5,18
  Bottom 0.254: v8.5,22.75 8.5,20.52 5,20.52 RESET_SW.1
SCART_BLANKING
  Top 0.254: R50.1 37.25,14.5 37,14.25 22,14.25 21.5,13.75 21.5,7.78 X2.16
SCART_BLUE  (1 unrouted)
  Bottom 0.6: R33.1 R32.1 R31.1 38.5,12.75 38.5,2.79
SCART_COMP
  Bottom 0.6: R14.1 R13.1 | X2.19 15.76,12.75 R13.1 | 16,12.75 R13.1
SCART_GREEN
  Bottom 0.6: R28.1 R27.1 R26.1 31,12.75 X2.11
SCART_LEFT
  Bottom 0.2: 46.24,11.91 C3.2
  Bottom 0.4: X2.3 46.24,11.91
SCART_RED
  Bottom 0.6: R16.1 R20.1 R15.1 23.38,12.75 X2.15
SCART_RIGHT
  Bottom 0.254: 50.05,10.6 50,10.6 C4.2
  Bottom 0.4: X2.1 50.05,10.6
TCK  (via drill 0.6)  (2 unrouted)
  Top 0.254: 58.5,38 58.5,26.25 58.34,26.09 58.25,26.09 | 57.84,26.09 58,26.25 | 58,26.25 v58,26.75 | IC1.6 58.25,26.09 | 58,26.25 58.09,26.25 58.25,26.09
  Bottom 0.254: v58,26.75 58,26.25 57.75,26 53.5,26 53.25,25.75 53.25,22 54.5,22 55,21.5 55,20.73 JP3.3
TDI_FPGA  (1 unrouted)
TDO_EXP  (via drill 0.6)  (1 unrouted)
  Top 0.254: v57,24 58,25 59,25 59.5,25.5 59.5,37
  Bottom 0.254: JP3.1 57.23,23.77 v57,24
TDO_FPGA  (1 unrouted)
  Top 0.254: 57.5,37 57.5,29 56.5,29 56.5,27.5 56.39,27.39 IC1.4
TDO_PROM  (via drill 0.6)  (2 unrouted)
  Top 0.254: IC1.17 60.11,27.39 60,27.5 | 60,27.5 60,25 59,24 v58.5,24 | 60,27.5 60,37
  Bottom 0.254: v58.5,24 58.5,22.5 60,21
TMS  (via drill 0.6)  (2 unrouted)
  Top 0.254: 58,37 58,28.5 57,28.5 | IC1.5 56.74,26.74 57,27 57,28.5 | 57,28.5 v57.5,28
  Bottom 0.254: v57.5,28 57,27.5 57,27 56.75,26.75 52.75,26.75 52.5,26.5 52.5,21.5 55,19 55,16.5 55.5,16 57.19,16 JP3.5
VCC  (via drill 0.6)  (18 unrouted)
  Top 0.2: R46.2 98.45,25.5 | 98.45,25.5 R39.2 98.45,28.25 | 98.45,28.25 R38.2 R37.2 | R35.2 98.45,28.25 | R36.2 98.45,25.5 | R40.1 97.45,40 | 97.45,40 R41.1 97.45,42.62 | 97.45,42.62 R42.1 R43.1 | R44.1 97.45,40 | R45.1 93.38,43 93.62,42.75 97.33,42.75 97.45,42.62 | v72,71 v72,66
  Top 0.254: IC1.20 IC1.19 IC1.18 62.96,28.04 63,28 63,23 62.25,22.25 61.5,22.25 | v42,23.75 42,27.75 41.5,28.25 41.5,30.52 U1.P66 41.5,30.58 41.5,33 v41.75,33 42.25,33.5 v44.75,33.5 U1.P75 | IC2.8 2.21,29.96 1.5,29.25 1.5,21.25 2,21.25 | 2,21.25 10,21.25 | 61.5,22.25 51.5,22.25 v51,22.75 | JP3.4 61.5,18.5 61.5,22.25 | R52.1 2.5,20.75 2,21.25 | U$2.VDD 10.22,23.73 10,23.5 10,21.25 | 10,21.25 v10,19.25 | U1.P54 35.48,33.48 35.5,33.5 35.5,36 v36,36.5 | U1.P34 v26.5,33.5 | U1.P43 29.97,32.97 v30,33.25 | U1.P19 v26.5,41 32,41 | U1.P3 v26.5,49 | U1.P138 29.97,49.78 v30,49.25 | U1.P106 44.75,49 v44.75,48.5 | U1.P91 v44.75,41.5 | U1.P115 41.47,49.47 v41.25,49.25 | U1.P126 35.97,46.47 v36.5,46
  Top 0.61: U$4.4 13.5,57.75 14,57.25 14,52.25 13.5,51.75 11.73,51.75 | 11.73,51.75 U$3.7 | 11.73,51.75 U$3.6 U$3.3 U$3.2
  Bottom 0.2: 71.55,72.55 71.55,72.95 71.5,73 | 72.01,72.51 v72.01,71.01 v72,71 | v72,66 R6.2
  Bottom 0.254: 26.5,21.75 26.6,21.85 Q6.3 Q8.3 | Q7.3 42,22.75 | v42,23.75 42,22.75 | v10,19.25 15,19.25 16.5,20.75 16.5,22 18.5,22 | v51,22.75 42,22.75 | v26.5,33.5 26.65,33.65 C16.1 29.6,33.65 v30,33.25 | v26.5,49 28,49 C9.1 28.1,48 | v44.75,48.5 44.6,48.65 C13.1 C7.1 41.35,47.85 41.5,48 41.25,48.25 v41.25,49.25 | v44.75,33.5 43.5,33.5 43.25,33.75 | 43.25,33.75 43,34 | v44.75,41.5 43,41.5 | v41.75,33 41,33.5 C8.1 | C17.1 43.25,33.75 | C14.1 v30,33.25 | v30,33.25 30,33 | C15.1 35.5,37 v36,36.5 | v30,49.25 30,48 | 30,48 28.1,48 | 30,48 C12.1 | v36.5,46 36,46 35,45 | 28.1,48 28.1,48.9 | C11.1 v26.5,41
  Bottom 0.4: T1.3 72.01,72.51 72,72.5 | T3.3 72.04,67.51 R6.2 | R4.2 71.55,72.55 71.5,72.5
  Bottom 0.6: Q5.3 26.5,21.85 26.5,21.75 | Q7.3 Q8.3
VCC5  (via drill 0.6)  (1 unrouted)
  Top 0.4: v74,78.5 v74,63.5
  Top 0.61: U$4.3 2.06,55.44 | 2.06,55.44 2,55.5 2,64.5 | U$3.4 2.15,49.84 2,50 | 2,50 2,55.38 2.06,55.44 | REG2.5.3 2.06,42.44 2,42.5 | 2,42.5 2,50 | REG1.2.3 2.31,34.69 2,35 2,42.5
  Bottom 0.4: X3.5 81.25,67.25 77.5,63.5 75.55,63.5 R7.2 75.5,63.5 v74,63.5 | R5.2 74.05,78.45 v74,78.5
VCCAUX  (via drill 0.6)  (2 unrouted)
  Top 0.254: REG2.5.2 5.65,45 11.5,45 | 32.5,32 v32,32 | U1.P62 39.5,30.58 39.5,33 | 39.5,33 39.5,39 33.5,39 32.5,38 32.5,32 | U1.P48 32.5,30.58 32.5,32 | v38.5,33.25 39,33 39.5,33 | U1.P134 31.97,50.5 | 31.97,50.5 31.97,50.28 v32,50 | U1.P120 38.97,50.47 | 38.97,50.47 39.5,50 39.5,43.5 | 31.97,50.5 32.47,50 32.5,50 32.5,43.5 | 38.97,50.47 38.97,49.53 v39,49.5
  Top 0.6: 39.5,39 39.5,43.5 32.5,43.5 32,44 v31.5,44 | REG2.5.4 18.25,44.75 v20.5,42.5
  Bottom 0.254: C21.1 32,32.9 v32,32 | C18.1 38.5,34.15 v38.5,33.25 | C19.1 32,49.35 v32,50 | v39,49.5 38.5,49.5 38.5,49 39,48.5
  Bottom 0.6: v20.5,42.5 26,42.5 27.5,44 v31.5,44
VCCAUX_R
  Top 0.254: 39.48,25.23 37,22.75 37,22.25 | 37,21.75 37,22.25 | R50.2 37.25,22 37,22.25
VCCINT  (via drill 0.6)  (1 unrouted)
  Top 0.254: U1.P61 39,30.58 39,32 v38.5,32 38,32 37,33 37,37.5 33,37.5 33,32 | REG1.2.2 REG1.2.4 | U1.P49 33,30.58 33,32 | 33,32 v33.75,32 | U1.P133 32.47,51.03 33,50.5 v34,50.5 | 38,50.5 38.5,51 38.5,52
  Top 0.6: v37,50.5 38,50.5 38,45.5 v37,44.5 | 37,37.5 v37,38 | 14.25,37 18,37 v20.5,39.5
  Top 0.61: REG1.2.4 14.25,37
  Bottom 0.254: v38.5,32 38,32 | v33.75,32 34.5,32 | 38,32 37.25,32.75 C25.1 | 34.5,32 38,32 | 34.5,32 35,32.5 C24.1 | 36.75,50.25 v37,50.5
  Bottom 0.6: v37,50.5 v34,50.5 34.5,50 C22.1 | C23.1 36.75,50.25 | v37,38 37,40 | 37,40 v37,44.5 | v20.5,39.5 26,39.5 27,38.5 32,38.5 33.5,40 37,40